# Altium PCB Ethernet_bridge(BOT).PcbDoc
Units mil, origin at the board's own origin, x right, y up, seen from the top; angles counter-clockwise.
Board outline 7205 x 4029 mil, 2 copper layers (Top Layer, Bottom Layer); 47 components, 34 nets, 155 pads, 92 vias.
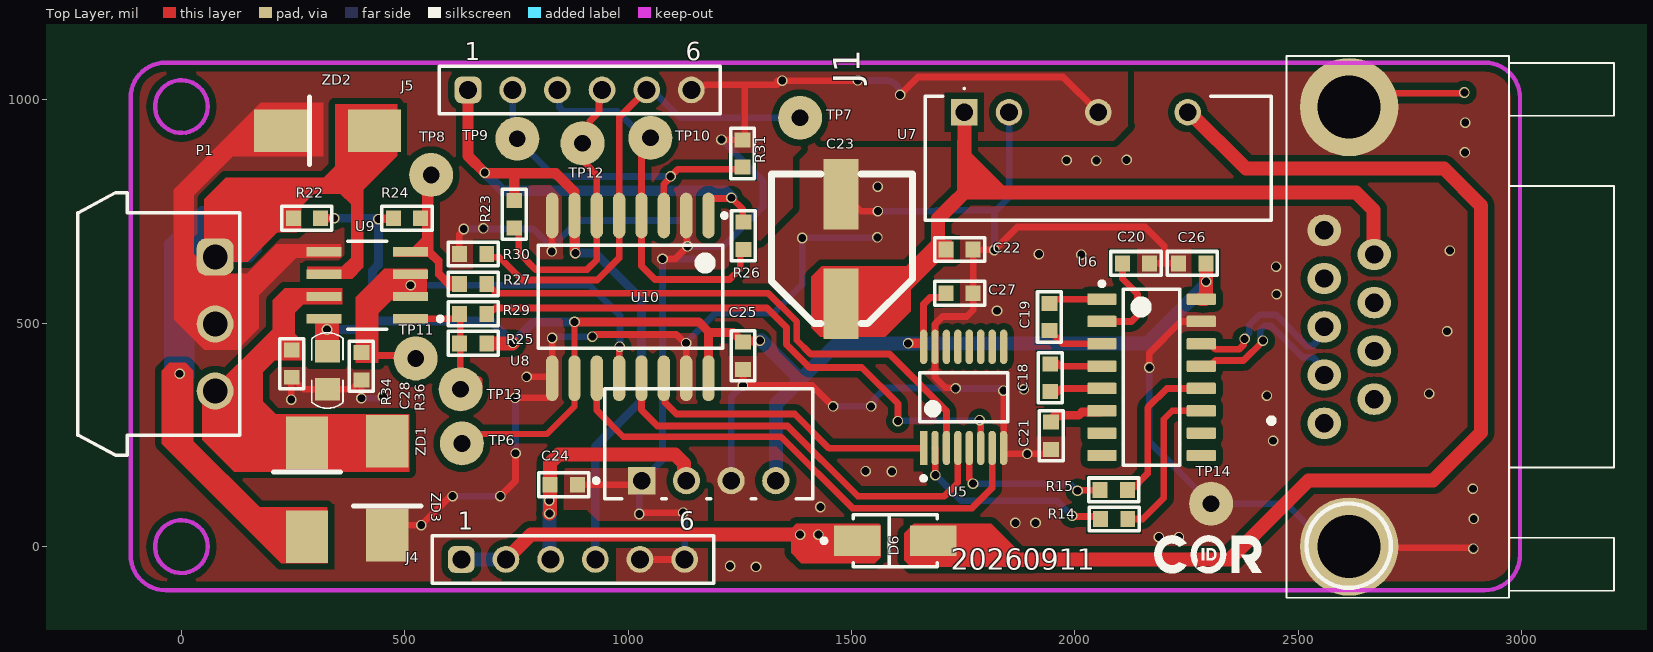
[diagram p0: Top Layer view]
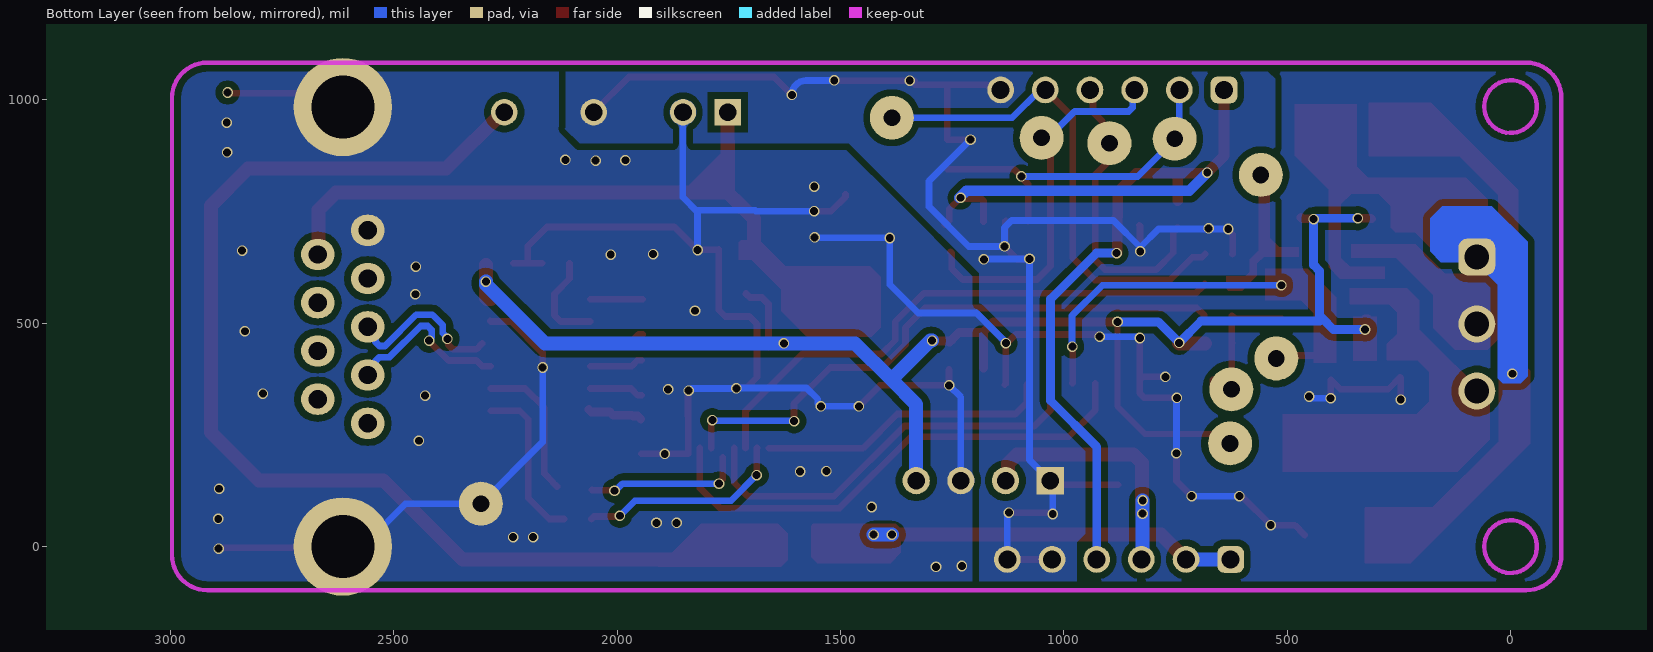
[diagram p1: Bottom Layer view, seen from below]
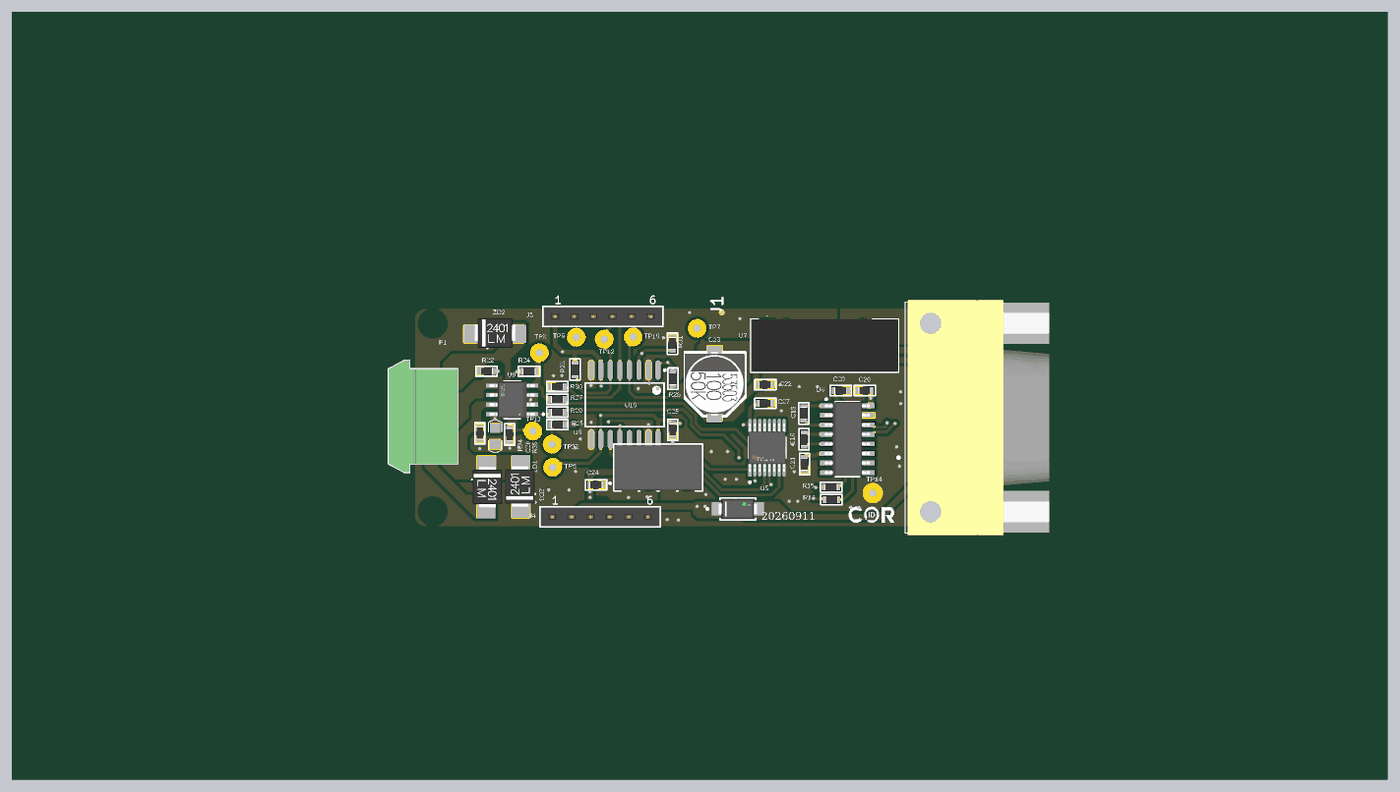
[diagram p2: 3D render of the assembled board from above, using the file's embedded part models]

## Layer stack, top to bottom
Top Solder: solder mask 0.4, Solder Resist, Dk 3.5
Top Layer: signal copper 1.4
Dielectric 1: dielectric 12.6, FR-4, Dk 4.8
Bottom Layer: signal copper 1.4
Bottom Solder: solder mask 0.4, Solder Resist, Dk 3.5

## Board outline
-2204,-1408 5001,-1408 5001,2621 -2204,2621

## Design rules (kind name [scope] priority, off if disabled: settings)
Clearance [All] p1: gap=8 ignorepadtopadclearanceinfootprint=TRUE except(6: Arc-Hole Track-Hole SMDPad-Hole THPad-Hole Via-Hole Fill-Hole Poly-Hole Region-Hole Text-Hole; 15: Arc-Fill Arc-Poly Arc-Region Track-Fill Track-Poly Track-Region SMDPad-Fill SMDPad-Poly SMDPad-Region THPad-Fill THPad-Poly THPad-Region Via-Fill Via-Poly Via-Region Fill-Fill Fill-Poly Fill-Region Poly-Poly Poly-Region Region-Region)
ComponentClearance [All] p1: gap=7.87 collisioncheckmode=3 verticalgap=10 showdistances=FALSE
DiffPairsRouting [All] p1: maxlimit=10 minlimit=10 mostfreqgap=10 toplayer_minwidth=7.87 toplayer_maxwidth=15 toplayer_prefwidth=10 bottomlayer_minwidth=7.87 bottomlayer_maxwidth=15 bottomlayer_prefwidth=10 maxuncoupledlength=500
HoleSize [All] p1: absolutevalues=TRUE maxlimit=196.85 minlimit=0 maxpercent=80.000 minpercent=20.000
HoleToHoleClearance [All] p1: gap=5.91 allowstackedmicrovias=TRUE
MinimumSolderMaskSliver [All] p1: minsoldermaskwidth=5.91
PlaneConnect [All] p1: planeconnectstyle=Direct reliefexpansion=20 reliefentries=4 reliefconductorwidth=10 reliefairgap=10
PolygonConnect [All] p1: connectstyle=Direct reliefconductorwidth=10 reliefentries=4 polygonreliefangle="90 Angle" airgapwidth=10
RoutingVias [All] p1: holewidth=17.72 width=23.62 viastyle="Through Hole" minholewidth=11.81 minwidth=19.68 maxholewidth=78.74 maxwidth=78.74
SilkToSilkClearance [All] p1: silktosilkclearance=5.91
SilkToSolderMaskClearance [IsPad] p1: minsilkscreentomaskgap=5.91 clearancetoexposedcopper=TRUE
SolderMaskExpansion [All] p1: expansion=4 istentingtop=FALSE
SupplyNets "Schematic Supply Nets_5" [InNet('+5V')] p1: voltage=0.000
SupplyNets "Schematic Supply Nets_4" [InNet('GND_2')] p2: voltage=0.000
SupplyNets "Schematic Supply Nets_3" [InNet('+3V3_MCU')] p3: voltage=0.000
SupplyNets "Schematic Supply Nets_2" [InNet('VCC')] p4: voltage=0.000
SupplyNets "Schematic Supply Nets_1" [InNet('GND')] p5: voltage=0.000
SupplyNets "Schematic Supply Nets" [InNet('+5V_ISO')] p6: voltage=0.000
UnRoutedNet [All] p1: checkbadconnections=TRUE
UnpouredPolygon [All] p1: allowunpoured=TRUE
Width [All] p1: maxlimit=196.85 minlimit=10 preferedwidth=19.68 minimp=50.000000 maximp=50.000000 favimp=50.000000
20 further rules are at their usual default settings.

## Components (designator, comment, footprint, x,y, rotation, side; value= is the part's Value field where it differs from the comment)
C18 "0.1uF" CAP-0603 1945,378 r90 top
C19 "0.1uF" CAP-0603 1943,514 r90 top
C20 "0.1uF" CAP-0603 2137,634 r180 top
C21 "0.1uF" CAP-0603 1947,248 r90 top
C22 "100nF" CAP-0603 1742,665 r180 top
C23 "330uF 25V" CAP_SMD_SIZE_E 1476.38,669 r270 top
C24 "100nF" CAP-0603 855.92,138.55 r180 top
C25 "100nF" CAP-0603 1257,427 r90 top
C26 "100nF" CAP-0603 2263,634 r0 top
C27 "100nF" CAP-0603 1742,567 r180 top
C28 "0.47uF" CAP-0805 327,394.64 r270 top
D6 "SS14" DO-214-AC 1598,13 r180 top
J1 "DB9 pcb  MALE!!!" DB-9_2 1573.19,846.98 r90 top
J4 "61300611821" 61300611821 876.57,-28.66 r0 top locked
J5 "61300611821" 61300611821 891.57,1022.32 r0 top locked
P1 "691305340003" 691305340003 -50.39,498.35 r270 top locked
R14 "33R" RES-0603 2088,62 r180 top
R15 "33R" RES-0603 2087,127 r180 top
R22 "10K" RES-0603 281,735 r0 top
R23 "10K" RES-0603 745,744 r90 top
R24 "10K" RES-0603 505,735 r180 top
R25 "10K" RES-0603 653,455 r0 top
R26 "10K" RES-0603 1258,696 r90 top
R27 "100" RES-0603 653,588 r0 top
R29 "100" RES-0603 653,521 r0 top
R30 "10K" RES-0603 653,655 r0 top
R31 "10K" RES-0603 1256,880 r270 top
R34 "10K" RES-0603 247,409.64 r90 top
R36 "10K" RES-0603 402.84,403.64 r90 top
TP6 "Test_Point_PCB" TEST_POINT 628,231 r0 top
TP7 "Test_Point_PCB" TEST_POINT 1385,960 r0 top
TP8 "Test_Point_PCB" TEST_POINT 559,832 r0 top
TP9 "Test_Point_PCB" TEST_POINT 752,913 r0 top
TP10 "Test_Point_PCB" TEST_POINT 1050,915 r90 top
TP11 "Test_Point_PCB" TEST_POINT 524.58,421.15 r90 top
TP12 "Test_Point_PCB" TEST_POINT 898,903 r90 top
TP13 "" TEST_POINT 625,352 r90 top
TP14 "Test_Point_PCB" TEST_POINT 2305,96 r90 top
U5 "TMUX1574PWR" TSSOP-16-A 1751,334 r90 top
U6 "MAX3232" SOIC-16-M 2171.78,379 r0 top
U7 "B1212S-3WR2" B1212S-3WR2 2052.6,877.32 r0 top locked
U8 "B0505S-1W" B0505S-1W 1180.59,230.35 r0 top locked
U9 "MAX485" SOIC-8-MFG 416,585 r180 top
U10 "ADUM1401BRWZ" ADI-RW-16_M 1005,559.06 r270 top
ZD1 "P6SMB16CA" DO-214AA 281,217 r270 top
ZD2 "P6SMB16CA" DO-214AA 237,931 r0 top
ZD3 "P6SMB16CA" DO-214AA 461,41 r90 top

## Footprints (in the part's own frame and the unit in brackets; to place one, negate y for a bottom-side part, rotate by r counter-clockwise, add the part's x,y. Pads: shape width x height; smd on the part's side, far side on the other; paste and mask are expansions set on the pad)
61300611821 [mm] "Socket Header, Pitch 2.54 mm, THT, Vertical, single row, 6p"
  rrect50% 1.52x1.52 hole 1.02: 1(-6.35,0)
  round 1.52 hole 1.02: 2(-3.81,0) 3(-1.27,0) 4(1.27,0) 5(3.81,0) 6(6.35,0)
  silkscreen extent -8,-1.35 8,1.35, body extent -7.87,-1.25 7.87,1.25, height 8.55
691305340003 [mm] "Horizontal PCB Header with Plastic Latch, pitch 3.81mm, 03p"
  rrect50% 2.1x2.1 hole 1.4: 1(-3.81,3.2)
  round 2.1 hole 1.4: 2(0,3.2) 3(3.81,3.2)
  silkscreen extent -7.47,-4.6 7.47,4.6, body extent -7.46,-4.6 7.46,4.6, height 7.25
ADI-RW-16_M [mm] "SOIC, 16-Leads, Body 10.3x7.5mm, Pitch 1.27mm, IPC Low Density"
  oval 2.6x0.7 smd: 1(-4.625,4.445) 2(-4.625,3.175) 3(-4.625,1.905) 4(-4.625,0.635) 5(-4.625,-0.635) 6(-4.625,-1.905) 7(-4.625,-3.175) 8(-4.625,-4.445) 9(4.625,-4.445) 10(4.625,-3.175) 11(4.625,-1.905) 12(4.625,-0.635) 13(4.625,0.635) 14(4.625,1.905) 15(4.625,3.175) 16(4.625,4.445)
  silkscreen extent -4.75,-5.25 2.93,5.47, body extent -3.8,-5.25 3.8,5.25, height 2.65
B0505S-1W [mm]
  rect 1.55x1.55 hole 1 paste-2539.97 mask+0: 1(-3.81,-2.1)
  round 1.55 hole 1 paste-2539.97 mask+0: 2(-1.27,-2.1) 3(1.27,-2.1) 4(3.81,-2.1)
  silkscreen extent -6.52,-3.13 5.92,3.13, body extent -6.02,-3.22 6.02,3.22, height 0.25
B1212S-3WR2 [mm]
  rect 1.5x1.5 hole 1: 1(-7.62,2.413)
  round 1.5 hole 1: 2(-5.08,2.413) 4(0,2.413) 6(5.08,2.413)
  silkscreen extent -9.83,-3.74 9.82,3.81, body extent -9.8,-3.68 9.8,3.32, height 10
CAP-0603 [mm]
  rect 0.85x0.9 smd: 1(-0.775,0) 2(0.775,0)
  silkscreen extent -1.43,-0.67 1.43,0.67, body extent -0.85,-0.45 0.85,0.45, height 0.55
CAP-0805 [mil]
  rect 50x55 smd: 1(-42.5,0) 2(42.5,0)
  silkscreen extent -84,-35 85,35
CAP_SMD_SIZE_E [mm]
  rect 4x2 smd: 1(3.175,0) 2(-3.048,0)
  silkscreen extent -4.19,-3.94 4.32,4.06, body extent -4.25,-4 4.25,4, height 10.59
DB-9_2 [mil]
  oval 70x75 hole 40.94: 1(-570.98,-985) 2(-462.99,-985) 3(-355,-985) 4(-246.97,-985) 5(-138.98,-985) 6(-516.97,-1096.81) 7(-408.98,-1096.81) 8(-300.98,-1096.81) 9(-192.99,-1096.81)
  round 220 hole 140.87: MH1(-846.93,-1040.91) MH2(136.93,-1040.91)
  silkscreen extent -961,-1634 251,-861, body extent -971,-1655 261,-915, height 494
DO-214-AC [mm]
  rect 2.65x1.75 smd paste+0 mask+0: 1(-2.15,0) 2(2.15,0)
  silkscreen extent -2.37,-1.48 4.17,1.48, body extent -3.57,-1.58 3.57,1.58, height 0.25
DO-214AA [mm]
  rect 3x2.4 smd: 1(-0.381,0) 2(4.953,0)
  silkscreen extent 1.27,-1.9 1.27,1.91, body extent -0.53,-1.85 5.07,2.1, height 2.65
RES-0603 [mm]
  rect 0.85x0.9 smd: 1(-0.775,0) 2(0.775,0)
  silkscreen extent -1.43,-0.67 1.43,0.67, body extent -0.85,-0.45 0.85,0.45, height 0.55
SOIC-8-MFG [mm]
  rect 1.98x0.53 smd paste+0 mask+0: 1(-2.465,1.905) 2(-2.465,0.635) 3(-2.465,-0.635) 4(-2.465,-1.905) 5(2.465,-1.905) 6(2.465,-0.635) 7(2.465,0.635) 8(2.465,1.905)
  silkscreen extent -4.28,-2.5 1.1,2.5, body extent -3.55,-2.75 3.55,2.75, height 0.25
SOIC-16-M [mm]
  rrect15% 1.65x0.65 smd: 1(-2.825,4.445) 2(-2.825,3.175) 3(-2.825,1.905) 4(-2.825,0.635) 5(-2.825,-0.635) 6(-2.825,-1.905) 7(-2.825,-3.175) 8(-2.825,-4.445) 9(2.825,-4.445) 10(2.825,-3.175) 11(2.825,-1.905) 12(2.825,-0.635) 13(2.825,0.635) 14(2.825,1.905) 15(2.825,3.175) 16(2.825,4.445)
  silkscreen extent -2.95,-5 1.6,5.44, body extent -3,-4.95 3,4.95, height 1.59
TEST_POINT [mm]
  round 2.5 hole 0.95: 1(0,0)
TSSOP-16-A [mm] "TSSOP-16 pacadge"
  rect 1.955x0.421 smd paste+0 mask+0: 1(-2.875,2.275)
  rrect100% 1.955x0.421 smd paste+0 mask+0: 2(-2.875,1.625) 3(-2.875,0.975) 4(-2.875,0.325) 5(-2.875,-0.325) 6(-2.875,-0.975) 7(-2.875,-1.625) 8(-2.875,-2.275) 9(2.875,-2.275) 10(2.875,-1.625) 11(2.875,-0.975) 12(2.875,-0.325) 13(2.875,0.325) 14(2.875,0.975) 15(2.875,1.625) 16(2.875,2.275)
  silkscreen extent -4.73,-2.5 1.4,2.5, body extent -4.35,-3 4.35,3, height 0.25

## Part data
C18 C19 C20 C21 C22 C24 C25 C26 C27 C28: library part CAP-NON-POLAR
C23: library part CAP_POL_SMD
J1: library part DB9
J4 J5: "WR-PHD Socket Header, THT, Vertical, pitch 2.54mm, 1 Row, 6P", Contact Resistance=20mΩ, Manufacturer="Wurth Elektronik", Operating Temperature Max=125°C, Operating Temperature Min=-40°C, Rated Current=3A, Withstanding Voltage=500V, Working Voltage=250V, Category="Board-to-Board Connectors", ComponentLink1Description="Website Link", ComponentLink1URL=https://www.we-online.com/redexpert/article/61300611821?ad, ComponentLink2Description="Datasheet Link", ComponentLink2URL=https://www.we-online.com/redexpert/spec/61300611821?ad, Gender="Socket Header", Manufacturer Part Number=61300611821, Match Code=WR-PHD, Mount="Through Hole", Number of Pins=6, Number of Rows=1, Orientation=Vertical, Packaging=Tray, Pitch=2.54mm
P1: "WR-TBL Series 3053 Horizontal PCB Header, THT, pitch 3.81mm, 3p", Manufacturer="Wurth Elektronik", Operating Temperature Max=105°C, Operating Temperature Min=-40°C, Rated Current=12A, Working Voltage=300V, Application=Pluggable, Category="Terminal Blocks", ComponentLink1Description="Website Link", ComponentLink1URL=https://www.we-online.com/redexpert/article/691305340003?ad, ComponentLink2Description="Datasheet Link", ComponentLink2URL=https://www.we-online.com/redexpert/spec/691305340003?ad, Manufacturer Part Number=691305340003, Match Code=WR-TBL, Modularity=No, Mount="Through Hole", Number of Pins=3, Number of Rows=1, Orientation=Horizontal, Packaging=Box, Pitch=3.81mm
R14 R15 R22 R23 R24 R25 R26 R27 R29 R30 R31 R34 R36: library part RES-CONST
TP6 TP7 TP8 TP9 TP10 TP11 TP12 TP13 TP14: library part TP_PCB?, "Test_Point"
U10: library part CMP-0534-00565-1, "Quad Channel Digital Isolator, 2.5 KV rms Insulation Rating, 10 Mbps Data Rate, 50 ns Delay, Industrial, 16-pin SOIC (RW-16), Tube", Manufacturer="Analog Devices", Max Operating Temp (degreesC)=125, Code_JEDEC=MS-013-AA, ComponentLink1Description="Manufacturer URL", ComponentLink1URL=http://www.analog.com/en/index.html, ComponentLink2Description=Datasheet, ComponentLink2URL=http://www.analog.com/static/imported-files/data_sheets/ADuM1400_1401_1402.pdf, ComponentLink3Description="Package Specification", ComponentLink3URL=http://www.analog.com/static/imported-files/packages/PKG_PDF/SOIC_WIDE%20%28RW%29/RW_16.pdf, ComponentLink4Description="URL Link1", ComponentLink4URL="Product URL:http://www.analog.com/en/interface-isolation/digital-isolators/adum1401/products/product.html", ComponentLink5Description="URL Link2", ComponentLink5URL="Reference Circuit:http://www.analog.com/en/interface-isolation/digital-isolators/adum1401/products/product.html#product-recommendations", DatasheetVersion="Rev. H", Max Data Rate=10Mbps, Mounting Technology="Surface Mount", PackageDescription="16-Pin Standard Small Outline Package, Body 10.3 x 7.5 mm, Pitch 1.27 mm", PackageReference=RW-16, PackageVersion="032707-B, 03/2007", PartNumber=ADUM1401BRWZ

## Via types
v1: diameter 23.62, hole 17.72, Top Layer to Bottom Layer, tented both sides, 91 vias
v2: diameter 23.62, hole 17.72, Top Layer to Bottom Layer, 1 vias

## Nets (pads, with @x,y where several pads share a name; then routed paths per layer and width w, separated by ;. In a path a pad name is that pad's centre, name@x,y a point inside that pad or via, vN(x,y) a via of type N, cw(c..) or ccw(c..) an arc to the next point about the centre after c; other vN are vias at no path point)
+3V3_MCU: J4.4 J5.1 R23.2 R26.2 U10.1 U10.7 | length 2193.6
  Top Layer w15: U10.1@1180,727 1180,773.55 1185.8,779.35 1232.35,779.35 v1@1234,781 ; v1(1231,781) 1256.78,755.22 1256.78,729.74 1266.02,720.51 R26.2@1267,720.51
  Top Layer w23.62: J5.1 641.57,874.43 680,836 837.6,836 879.25,794.35 879.25,739.31 881.82,736.74 880.75,735.67 880.75,658.25 v1(882,657) ; R23.2 745,836
  Bottom Layer w19.68: v1(882,657) 927,657 1030,554 1030,327 926.57,223.57 J4.4
  Bottom Layer w23.62: v1(679,837) 719,797 1218,797 v1@1234,781
+5V: C24.2 J4.3 U8.2 | length 618.5
  Top Layer w31.5: v1(824,74) 825.41,75.41 C24.2 825.41,187.4 843.86,205.85 1104.89,205.85 1124.94,185.79 1124.94,153.33 U8.2 ; J4.3 J4.3@832,-23.24
  Bottom Layer w31.5: v1@824,103.23 v1(824,74) 824,-26.09 J4.3 ; U8.2@1124.94,153.33 U8.2
  other v1: 823.52,103.23
+5V_ISO: C25.2 C26.2 C27.2 C28.1 R22.2 R24.2 R25.2 TP6.1 U5.16 U6.16 U8.4 U9.8 U10.10 U10.16 | length 3791.8
  Top Layer w13.78: TP6.1 650.9,231 671.9,252 818,252 880,314 U10.10 880,451.34 879.88,451.45 879.88,481.6 880,481.72 v1(880,503)
  Top Layer w16.14: U5.16 1661.43,542.43 1676.35,557.35 1702.83,557.35 C27.2@1711.49,566.02
  Top Layer w19.68: R22.2@311.51,734 312.51,735 v1(342,735) ; U9.8 325.41,510 326,509.41 v1(326,486) 326.5,485.5 326.5,428.64 C28.1@326,428.14 ; v1(441,733) 441.75,733.75 467.6,733.75 467.6,735.09 R24.2@469.11,736.6 ; v1(880,503) 1158,503 1180,481 U10.16@1180,399.37 ; 1180,479 1235.51,479 1249.13,465.39 1249.13,464.4 1256.02,457.51 C25.2 1259.73,460.25 1294.25,460.25 v1(1295,461)
  Top Layer w21.18: v1(1627,455) U5.16@1659.13,455
  Top Layer w31.5: R25.2@684.51,455 741,455 v1(742,456) ; U6.16 2291.05,554 2294,556.95 v1(2294,593) C26.2@2294,630.62
  Bottom Layer w19.68: v1(326,486) 397,486 422,511 428,517 ; v1(342,735) 437.93,735 439.93,733 v1(441,733) 441,630.59 428,617.59 428,517 ; v1(880,503) 789,503 v1(742,456) 693,505 428,505 428,517
  Bottom Layer w31.5: v1(1295,461) 1299,461 1386.25,373.75 ; U8.4 1330.59,318.09 1386.25,373.75 ; v1(2294,593) 2294,587 2162,455 v1(1627,455) 1467.5,455 1386.25,373.75
GND: C24.1 J4.5 J4.6 J5.6 R30.1 R31.1 U7.4 U8.1 U10.2 U10.8 | length 3566.8
  Top Layer w15: R30.1 622.24,655.24 622.24,698.91 632,708.67 v1(632,711) ; v1(829,661) 829.5,661.5 829.5,717.66 U10.8@831.42,719.58 ; C24.1@878.43,138.55 C24.1 1021.47,138.55 U8.1 ; v1(1025,73) 1028,76 v1(1123,76) ; J4.5 J4.6 ; v1(1077,644) 1105,644 v1(1133,672) 1131.5,673.5 1131.5,727.59 U10.2@1130,729.09 ; J5.6 1150.15,1030.9 1169.69,1030.9 1172.78,1034 1261,1034 ; v1(1209,911) 1209.24,910.76 1261,910.76 1261,1034 ; v2(1514,1043.44) 1514,1043 v1(1345,1043) 1334,1043 1334,1034 1261,1034 ; v1(1609,1011) 1649,1051 1973.92,1051 U7.4
  Bottom Layer w15: v1(632,711) 788,711 v1@829,670 ; v1(829,661) v1@829,670 ; v1(1025,73) 1025,142.09 U8.1 1077,194.09 v1(1077,644) 1178,644 v1(1179,643) ; v1(1123,76) 1126.57,72.43 J4.6 J4.6@1127.74,-29.83 ; v1(1209,911) 1302,818 1302,761 1213,672 v1(1133,672) 1133,714 1117,730 889,730 v1@829,670 ; v2(1514,1043.44) 1576.56,1043.44 cw(c1576.56,1011) v1(1609,1011)
  other v1: 676.17,712.41
GND_2: C20.1 C21.1 C22.1 C23.2 C25.1 C26.1 C27.1 C28.2 J1.5 J1.MH1 J1.MH2 P1.2 R34.1 R36.1 TP14.1 U5.8 U5.15 U6.15 U7.2 U8.3 U9.5 U10.9 U10.15 ZD2.1 ZD3.1 | length 6936.2
  Top Layer w15: ZD2.1@190,922 126,922 4,800 4,550 44.97,509.03 96.4,509.03 107.09,498.35 107.09,514.92 142,549.83 142,584 218,660 U9.5 ; v1(246,329) 246,378.12 R34.1 247.98,379.12 257.22,369.89 257.22,368.91 273.99,352.14 380.86,352.14 401.85,373.12 R36.1 402.84,332.16 v1(403,332) ; ZD3.1 483,48 v1(537,48) 602,113 v1(607,113) ; v1(714,113) 748,147 v1(748,209) ; v1(747,333) 820.03,333 830,342.97 v1(830,467) ; v1(773,380) 824.2,380 U10.9@830,374.2 ; v1(920,470) 925,475 1108.01,475 1127.67,455.35 v1(1130,455.35) U10.15 1130,364.91 U10.15@1132.4,362.51 ; C25.1 v1(1257,361) 1412,361 v1(1459,314) ; C23.2@1489,789 1489,782.87 1520.87,751 v1(1559,751) ; v1(1733,354) 1731.35,355.65 1710.35,355.65 1687.02,378.98 U5.15 1687.02,498.02 1704,515 1758,515 1772.51,529.51 C27.1 C22.1 1773.01,664.5 1819.5,664.5 v1(1820,664) 1871.63,715.63 2157.37,715.63 2200,673 2200,634 ; v1(1840,349) 1841.65,347.35 1841.65,291.32 1840.57,290.23 1840.57,208.35 1841.29,207.63 C21.1@1945.99,207.63 ; U7.2@1853,961.08 U7.2@1853,973 ; v1(2166.75,400.87) 2166.75,433.75 2237,504 U6.15 U6.15@2284,505 ; C20.1 2200,634 ; C26.1 2200,634 ; TP14.1@2305,73.43 TP14.1 ; J1.MH1@2612.99,-1.12 2614.7,-2.83 2890.35,-2.83 v1(2892,-4.48)
  Bottom Layer w15: v1(403,332) 444.67,332 448.67,336 v1(451,336) ; v1(607,113) v1(714,113) ; v1(747,333) 748,332 v1(748,209) ; v1(830,467) 833,470 v1(920,470) ; v1(1130,455.35) 1130,457 1196,523 1326,523 1389.75,586.75 v1(1389.75,690.87) 1390.32,691.44 1557.44,691.44 v1(1558,692) ; U8.3 1230.59,334.59 v1(1257,361) ; v1(1459,314) v1(1544,314) 1551.06,321.06 1551.06,330.06 1576,355 1732,355 v1(1733,354) 1832.67,354 1837.67,349 v1(1840,349) ; v1(1559,751) 1689.67,751 1691.67,753 1820,753 ; v1(1820,664) 1820,749 1853,782 U7.2@1853,973 ; v1(2166.75,400.87) 2166.75,234.25 TP14.1 ; TP14.1@2308,96 2474.12,96 J1.MH1@2545,25.12
  other v1: 1286.32,-45.39 1228.32,-43.39 2188.12,21.15 2233.12,21.15 1867,53 1912,53 2893,62 1430.32,88.61 2891,129.52 1590.56,168.12 1531.56,169.12 1893.4,207.5 2443.75,236.87 2429.75,337.87 2793,342.52 1885.75,351.87 2833.56,482 1825.75,527.87 2451.75,564.87 2450.75,626.87 2014.38,653.72 1919.38,654.72 2839.56,662.52 1558.75,805.87 2048.23,863.87 1981.75,864.87 2115.75,865.87 2873,882.52 2874,949
NetC18_1: C18.1 U6.5 | length 121.9
  Top Layer w15: C18.1@1944.99,338.63 1953.85,338.63 1969.22,354 U6.5
NetC18_2: C18.2 U6.4 | length 121.1
  Top Layer w15: C18.2@1944.99,417.37 1953.85,417.37 1967.22,404 U6.4
NetC19_1: C19.1 U6.3 | length 126.1
  Top Layer w15: C19.1@1942.99,474.63 1951.85,474.63 1972.48,454 U6.3
NetC19_2: C19.2 U6.1 | length 117.8
  Top Layer w15: C19.2@1942.99,553.37 1943.31,553.69 2060.24,553.69 U6.1
NetC20_2: C20.2 U6.2 | length 216.1
  Top Layer w15: U6.2 2127,504 2140.5,517.5 2140.5,565.5 2106.49,599.51 C20.2
NetC21_2: C21.2 U6.6 | length 125.4
  Top Layer w19.68: C21.2@1947,285.51 1953.89,292.4 1964.81,292.4 1966.41,294 2009,294 2016.05,301.05 2057.61,301.05 U6.6 U6.6@2063.51,306.95
NetC22_2: C22.2 C23.1 J1.9 U7.1 | length 1635.8
  Top Layer w31.5: 1694.01,665 1694.01,734.01 1784,824 1786,824 ; U7.1@1753,973 1753,857 1817,793 2629,793 2668.9,753.09 J1.9@2668.9,653.99
  Top Layer w39.37: C23.1@1489,544 1489,558.31 1508.69,577.99 1607,577.99 1694.01,665
NetD6_1: D6.1 U7.6 | length 2590.6
  Top Layer w31.5: 1687,-29 2346,-29 2523,148 2802.01,148 2909,254.99 2909,763 2826,846 2383,846 2256,973 U7.6@2253,973
NetJ1_2: J1.2 U6.13 | length 390.5
  Top Layer w15: U6.13 2302.69,404 2315.19,416.5 2377.76,416.5 2421,459.74 v1(2421,461)
  Bottom Layer w15: v1(2421,461) 2421,463.33 2415.31,469.02 2415.31,485.21 2424.1,494 2439.59,494 2509.42,424.16 2532.21,424.16 2540.99,415.38 2540.99,412.49 2557.1,396.39 J1.2@2557.1,382.34
NetJ1_3: J1.3 U6.14 | length 366.8
  Top Layer w15: U6.14@2302.19,454.49 2315.19,441.5 2367.4,441.5 2378.35,452.45 2378.35,463.35 v1(2380,465)
  Bottom Layer w15: v1(2380,465) 2380,467.33 2390.31,477.64 2390.31,495.57 2413.74,519 2449.94,519 2519.78,449.16 2532.21,449.16 2540.99,457.95 2540.99,460.84 2557.1,476.94 J1.3@2557.1,490.99
NetJ5_2: J5.2 R31.2 TP9.1 U10.3 | length 784.8
  Top Layer w15: U10.3@1080,729.09 1080,811.29 1095,826.29 v1(1095,828.62) 1110.87,844.49 R31.2@1261,844.49
  Bottom Layer w15: J5.2 741.57,898.43 764.57,898.43 834.71,828.29 962.7,828.29 963.03,828.62 v1(1095,828.62)
NetJ5_3: J5.3 R26.1 TP10.1 U10.4 | length 838.6
  Top Layer w15: TP10.1@1046,904 1046,901.67 1030,885.67 U10.4 1030,628 1060,598 1227,598 1250.78,621.78 1250.78,656.26 R26.1@1254.02,659.49
  Bottom Layer w15: J5.3 846.17,1017.72 846.17,982.79 854.96,974 976,974 TP10.1@1046,904
NetJ5_4: J5.4 R23.1 TP12.1 U10.6 | length 659.1
  Top Layer w15: R23.1 745.98,713.49 755.22,704.26 755.22,657.78 793,620 908,620 930,642 930,729.09 930,831.58 880,881.58 TP12.1@880,883 ; TP12.1 913.96,918.96 913.96,951.96 935,973 935,1015.75 J5.4
NetJ5_5: J5.5 R30.2 TP7.1 U10.5 | length 1111.9
  Top Layer w15: R30.2 690.9,647.61 712.39,647.61 763,597 931,597 980,646 U10.5 980,960.75 J5.5
  Bottom Layer w15: J5.5 1053.68,1022.32 1116,960 TP7.1
NetP1_1: P1.1 R22.1 U9.6 ZD1.2 ZD2.2 | length 1658.2
  Top Layer w15: v1(-4,387) -4,225 199,22 ZD1.2 ; 107.09,698.35 133.71,724.97 ; 135.04,726.3 133.71,724.97 ; U9.6 379.21,610 388,618.79 388,801.51 ; ZD2.2@400,922 388,910 388,801.51 ; 133.71,724.97 241.46,724.97 250.49,734 250.49,778.49 273.51,801.51 388,801.51
  Bottom Layer w15: v1(-4,387) -4,651 25.75,680.75 89.49,680.75 107.09,698.35
NetP1_3: P1.3 R34.2 U9.7 ZD1.1 ZD3.2 | length 796.6
  Top Layer w15: R34.2@232,439.88 190.88,439.88 122.04,371.04 122.04,313.3 107.09,298.35 173.43,232 ZD1.1 457,232 ZD3.2 ; R34.2@233.85,439.15 245,439.15 245,528 274.07,557.07 316.02,557.07 U9.7 ; R34.2@238,440.15 R34.2
NetR14_1: R14.1 U6.11 | length 367.8
  Top Layer w15: R14.1 2152,62 2199,109 2199,285 2218,304 U6.11
NetR14_2: R14.2 U5.2 | length 471.3
  Top Layer w15: U5.2 1687.32,220.5 1687.32,160.68 v1(1688,160) ; v1(1994,69) 1995.65,67.35 2052.14,67.35 R14.2
  Bottom Layer w15: v1(1688,160) 1745.32,102.68 1960.32,102.68 v1(1994,69)
NetR15_1: R15.1 U6.12 | length 326.9
  Top Layer w15: R15.1@2134,134.51 2134.98,134.51 2144.22,143.74 2144.22,144.73 2163,163.51 2163,311 2206,354 U6.12
NetR15_2: R15.2 U5.5 | length 353.9
  Top Layer w15: U5.5@1763.8,199.54 1763.8,151.54 1772,143.33 v1(1772,141) ; v1(2006,125) 2007,126 2055.49,126 R15.2
  Bottom Layer w15: v1(1772,141) 1987.67,141 2003.67,125 v1(2006,125)
NetR24_1: R24.1 R27.1 TP8.1 U9.4 | length 401.3
  Top Layer w10: U9.4@506.44,660 U9.4 U9.4@541.07,660 ; TP8.1@535.43,831 544,831 544,735 544,662.93 U9.4@541.07,660 ; R27.1@623.49,588.98 619.38,593.09 593.91,593.09 576.5,610.5 576.5,639.5 556.5,659.5 541.57,659.5 U9.4@541.07,660
  Bottom Layer w15: TP8.1@520.46,834 535,819.46 TP8.1@571.54,819.46
NetR25_1: R25.1 R29.1 TP13.1 U9.1 | length 336.3
  Top Layer w15: U9.1 617.49,510 R29.1@624.49,517 ; TP13.1@606,335 TP13.1@606,336 ; R29.1@619.06,512.93 623.99,508 R25.1@623.99,454.5 ; R25.1@623.49,455 R25.1@623.99,454.5 ; TP13.1 624.24,352.76 624.24,415.15 ; TP13.1@666,356 TP13.1@666,373.39 ; R25.1@623.99,454.5 624.24,454.24 624.24,415.15 ; R25.1@623.99,454.5 623.99,415.41 624.24,415.15
NetR27_2: R27.2 U5.3 | length 1253.5
  Top Layer w15: R27.2@684.51,588 684.51,587.02 693.74,577.78 694.73,577.78 705.51,567 1314,567 1377.5,503.5 1377.5,462.03 1408.53,431 1585,431 1712.61,303.39 U5.3
NetR29_2: R29.2 U5.6 | length 1323
  Top Layer w15: R29.2@685.51,517 685.51,517.98 694.74,527.22 695.73,527.22 702.51,534 1311,534 1354.5,490.5 1354.5,452.5 1406,401 1523,401 1604,320 v1(1604,281) ; v1(1787,283) 1787,280.67 1789.09,278.58 1789.09,221.1 U5.6
  Bottom Layer w15: v1(1604,281) 1605,282 1786,282 v1(1787,283)
NetR36_2: R36.2 TP11.1 U9.2 U9.3 U10.12 | length 1043.4
  Top Layer w15: U9.2@509,562.93 U9.2@510.11,562.93 ; U9.3 U9.3 v1(513,585) 513,562.93 U9.2@510.11,562.93 ; TP11.1 518.08,427.65 409.33,427.65 R36.2 402.84,518.84 444,560 U9.2 U9.2@510.11,562.93 ; U10.12@981,365.91 980.5,366.41 980.5,447.19 v1(981,447.69)
  Bottom Layer w15: v1(513,585) 914,585 982,517 982,448.69 v1(981,447.69)
NetU5_1: U5.1 U10.14 | length 664.1
  Top Layer w15: U10.14@1080,364.91 1082.4,362.51 1082.4,322.6 1108.15,296.85 1373.15,296.85 1449.99,220.01 U5.1@1660.65,220.01
NetU5_4: U5.4 U10.13 | length 937.2
  Top Layer w15: U10.13@1030,364.91 1030,306 1066,270 1357,270 1514,113 1708,113 1737.91,142.91 1737.91,220.5 U5.4
NetU5_7: U5.7 U10.11 | length 1144.1
  Top Layer w15: U10.11@930,364.91 930,305 989,246 1342,246 1502,86 1770,86 1814.98,130.98 U5.7
VCC: D6.2 J4.1 J4.2 | length 951.7
  Top Layer w31.5: J4.2 782.24,27 v1(1385,27) v1(1426,27) 1511.35,27 D6.2@1513.35,25
  Bottom Layer w31.5: J4.1 J4.2 ; v1(1385,27) v1(1426,27)
pads on no net: J1.1 J1.4 J1.6 J1.7 J1.8 U5.9 U5.10 U5.11 U5.12 U5.13 U5.14 U6.7 U6.8 U6.9 U6.10
copper on no net: | length 272.8
  Top Layer w15: 2612.99,983.12 2644.74,1014.87 2870.35,1014.87 v1(2872,1016.52)

## Polygon pours and split planes (outlines as drawn)
GND_2 on Top Layer "GND_2_L01_P006" (solid, remove dead copper, pour order 6): -332,-189 3048,-189 3048,1175 -332,1175
GND on Top Layer "GND_L01_P004" (solid, remove dead copper, pour order 4): 2070,1139 616,1139 530,1053 530,595 842,283 842,83 907,83 974,16 974,-89 1178,-89 1178,567 1369,758 1369,872 1406,909 2087,909 2120,942 2118,944 2118,1099 2080,1137
GND_2 on Bottom Layer "GND_2_L02_P007" (solid, remove dead copper, pour order 7): -234,1142 3056,1142 3056,-365 -234,-365 -234,1136
GND on Bottom Layer "GND_L02_P005" (solid, remove dead copper, pour order 5): 2067.12,1132.93 613.12,1132.93 527.12,1046.93 527.12,588.93 839.12,276.93 839.12,76.93 904.12,76.93 971.12,9.93 971.12,-95.07 1190,-95.07 1190,611.81 1366.12,787.93 1481.12,902.93 2084.12,902.93 2117.12,935.93 2115.12,937.93 2115.12,1092.93 2077.12,1130.93

## Keep-outs
Keep-Out Layer:
  circle w9.84: c0,0 r59.06
  circle w9.84: c0,985 r59.06
  lines w9.84: -35.01,1083.35 ccw(c-35.01,1004.61) -113.75,1004.61 -113.75,-19.01 ccw(c-35.01,-19.01) -35.01,-97.75 2917.75,-97.75 ccw(c2917.75,-19.01) 2996.49,-19.01 2996.49,1004.61 ccw(c2917.75,1004.61) 2917.75,1083.35 ; -32.01,1083.35 2920.75,1083.35

## Other copper
Top Layer:
  rectangle net +5V_ISO: 299,415 353,515
  region net NetC22_2: 1737,910 1737,778 1871,778 1739,910
  region net NetR24_1: 474,670 518,670 540,692 540,849 564,849 564,663.21 584,643.21 584,615 594,605 637,605 637,578 632,573 601,573 568,606 568,633 552,649 474,649
  region net NetP1_1: 175,88 27,236 27,394 10,411 -27,411 -44,394 -44,230 223,-37 326,-37 326,87 325,88 326,87 325,88
  region net NetR36_2: 549,622 454,622 390,558 390,411.15 441,411.15 441,522 470,551 549,551
  region net NetP1_1: 70,638 51,657 51,778 99,826 319,826 344,851 344,990 483,990 483,875 407,799 407,625 382,600 282,600 282,626 359,626 380,647 380,766 356,790 296,790 268,762 268,714 258,704 215,704 149,638
  region net NetP1_3: 360,578 231,578 204,551 204,487 47,330 47,239 118,168 510,168 510,296 211,296 182,325 182,390 209,417 277,417 277,454 254,477 254,524 272.53,542.53 360,542.53
  region net GND_2: 318,994 178,994 -17,799 -17,509 51,441 125,441 173,489 173,563 257,647 357,647 357,677 212,677 146,611 73,611 28,656 28,787 115,874 318,874
  region net VCC: 1564,49 1562,51 1376,51 1365,40 1365,-14 1388,-37 1552,-37 1565,-24 1565,46
  region net NetC22_2: 1434,628 1623,628 1681,686 1723,686 1728,681 1728,642 1700,642 1633,575 1633,527 1576,470 1430,470 1410,490 1410,604
  region net NetD6_1: 1639,51 1813,51 1909,-45 1633,-45 1618,-30 1618,30
Bottom Layer:
  region net NetP1_1: -38,682 42,762 153,762 180,735 180,661 156,637 80,637 29,586 29,377 18,366 -23,366 -38,381

## Silkscreen, mask and mechanical layers (free items; w line width, h text height)
Top Overlay:
  drawing of 1211 lines, arcs and shapes, not listed
  text "20260911" at 1722,-68 h80
Mechanical 1:
  circle w0.5: c0.42,984.93 r59.06
  circle w0.5: c0.42,0.68 r59.06
  circle w0.5: c2614.99,-1.61 r59.06
  circle w0.5: c2614.99,987.21 r59.06

## Text inside footprints (layer, text, board x,y; h text height)
J4: Top Overlay "6" at 1114.37,38.27 h40; Top Overlay "1" at 619.09,38.27 h40
J5: Top Overlay "1" at 634.09,1089.25 h40; Top Overlay "6" at 1129.37,1089.25 h40